# EAGLE board Inverting Amplifier (EAGLE 9.7.0)

Size 148.37 x 68.14 mm. Coordinates in mm from the lower left corner, seen from the top.
Outline: 0,0 148.37,0 148.37,68.14 0,68.14 0,0
Copper layers (1*16): Top 0.035mm / dielectric 1.5mm / Bottom 0.035mm
Design rules "default": minimum track width 6mil, minimum drill 0.35mm, track to track 6mil, track to pad 6mil, pad to pad 6mil, via to via 6mil, smd to smd 6mil, copper to edge 40mil, drill to drill 6mil, minimum pad ring 10mil, minimum via ring 8mil, stop-mask expansion 4mil, vias tented up to drill 0mil, thermal gap 10mil

## Footprints (pad centres in the part's own frame; a part is rotated, then mirrored left to right if it is on the bottom)
BATTERY-GENERIC = drill 1.118 pad 3.15 octagon: + 2.54,0; - -2.54,0
RESAD1016W63L850D250B = drill 0.83 pad 1.43: 1 -5.08,0; 2 5.08,0
DIP826W53P254L959H508Q8B = drill 0.786 pad 1.386: 1 -4.13,3.81; 2 -4.13,1.27; 3 -4.13,-1.27; 4 -4.13,-3.81; 5 4.13,-3.81; 6 4.13,-1.27; 7 4.13,1.27; 8 4.13,3.81

## Placement (x,y rotation side)
FUNC1  FUNCTION-GENERATOR  [BATTERY-GENERIC]  19.07,49.02 180 top
P1  BATTERYGENERIC  [BATTERY-GENERIC]  8.26,8.26 180 top
P2  BATTERYGENERIC  [BATTERY-GENERIC]  140.11,58.38 180 top
R1  1k  [RESAD1016W63L850D250B]  60.54,56.63 0 top
R2  1k  [RESAD1016W63L850D250B]  88.48,59.17 90 top
U1  OPAMP_DIP  [DIP826W53P254L959H508Q8B]  79.59,55.36 180 top

## Library data of the parts
FUNC1 P1 P2 R1 R2 U1 = Tinkercad

## Nets
FUNC1+: FUNC1.+ R1.1
FUNC1-: FUNC1.- P1.- P2.- U1.7
P2+: P2.+ U1.3
U1_-IN: R2.1 U1.2
U1_OUT: R1.2 R2.2 U1.6

## Tracks (layer width: path | path; a pad name or v marks a point on that pad's centre or on a via)
FUNC1+  (1 unrouted)
FUNC1-  (3 unrouted)
P2+  (1 unrouted)
U1_-IN  (1 unrouted)
U1_OUT  (2 unrouted)